# Altium PCB NanoVTX_es1.PcbDoc (part 4 of 4)
Units mm, origin at the board's own origin, x right, y up, seen from the top; angles counter-clockwise.
Board outline 40.21 x 28.18 mm, 6 copper layers (Top Layer, GND1, SIGNAL, POWER, GND2, Bottom Layer), stack 0.816 mm thick; 295 components, 218 nets, 1362 pads, 709 vias.
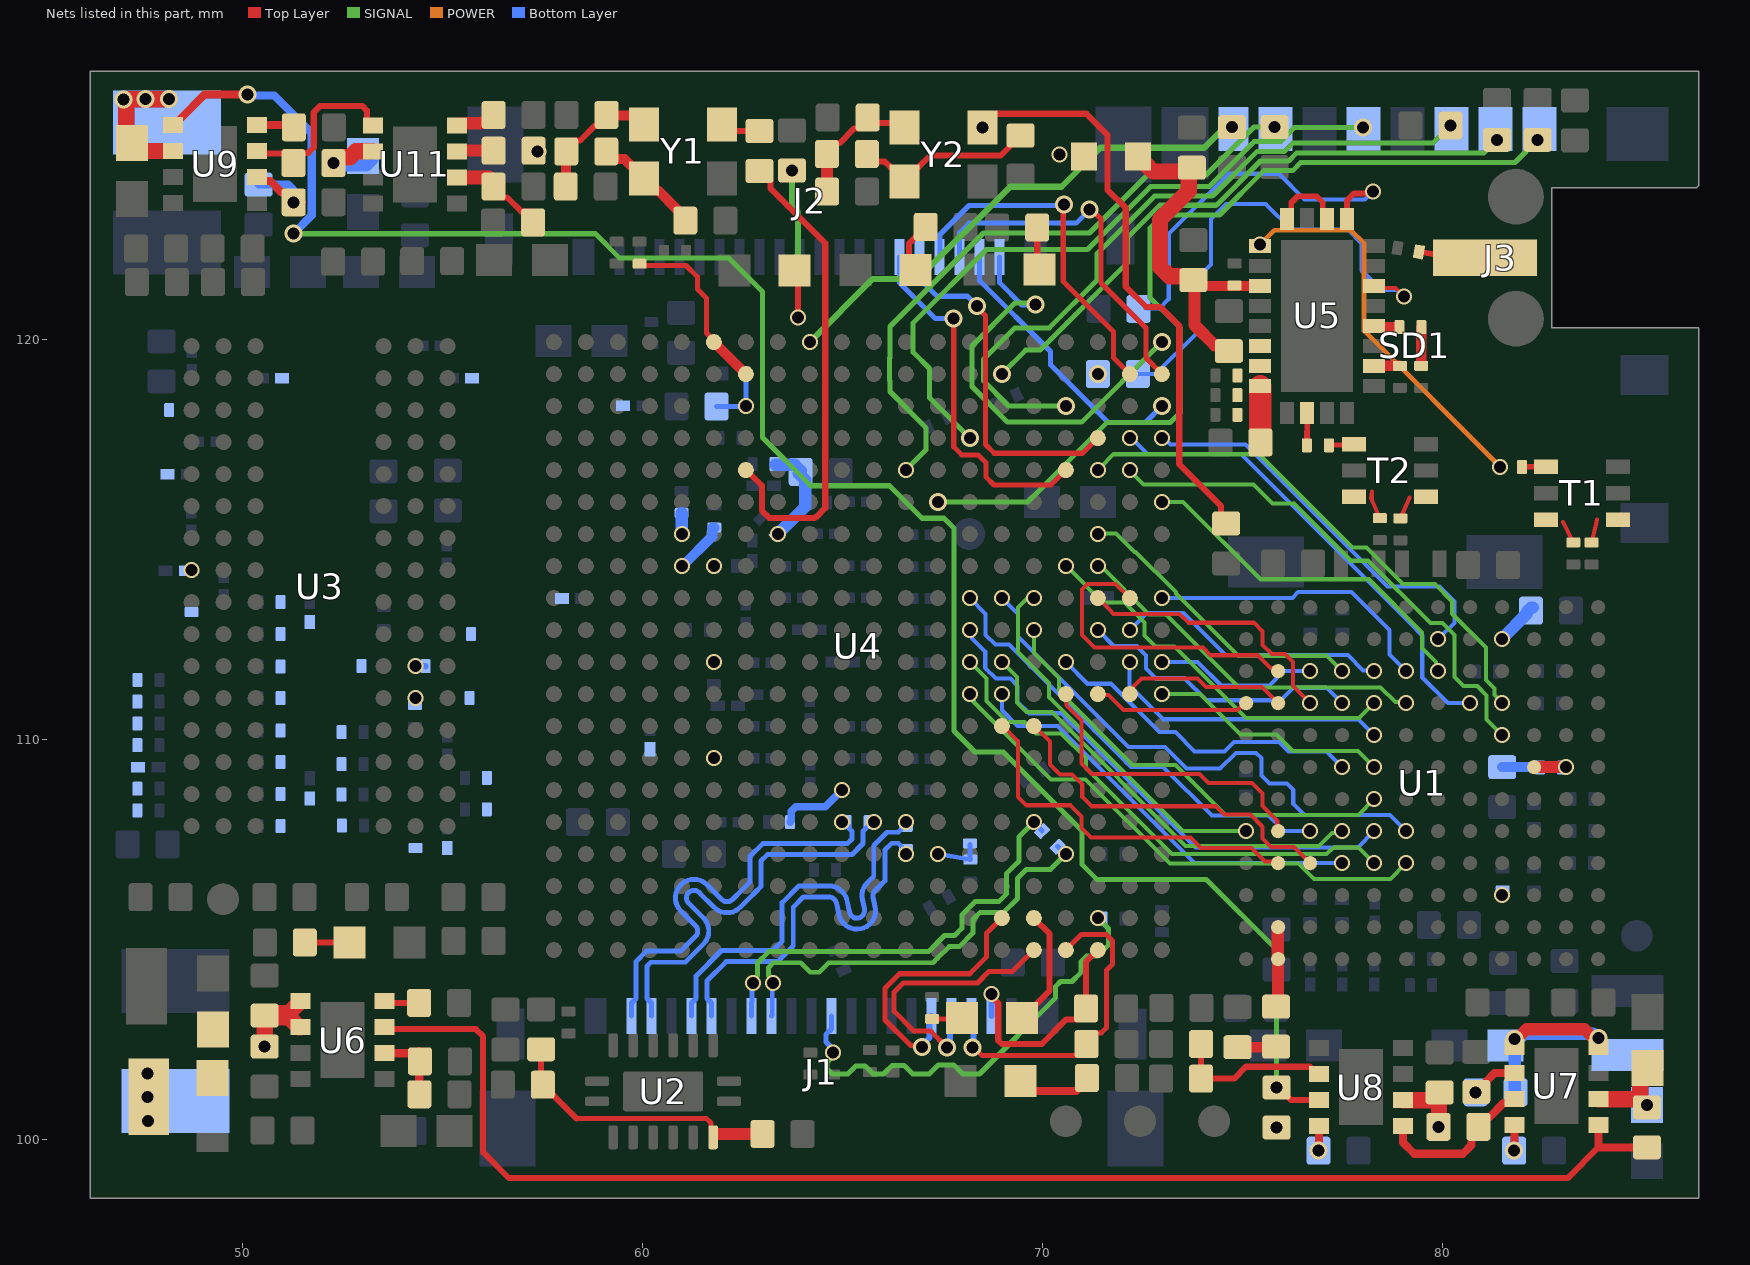
[diagram p7: the nets of this part, all layers, seen from the top]

## Via types
v1: diameter 0.4, hole 0.3, Top Layer to Bottom Layer, tented both sides, 609 vias
v2: diameter 0.45, hole 0.3, Top Layer to Bottom Layer, tented both sides, 85 vias
v3: diameter 0.5, hole 0.3, Top Layer to Bottom Layer, tented both sides, 13 vias
v4: diameter 0.5, hole 0.3, Top Layer to Bottom Layer, 2 vias

## Nets (pads, with @x,y where several pads share a name; then routed paths per layer and width w, separated by ;. In a path a pad name is that pad's centre, name@x,y a point inside that pad or via, vN(x,y) a via of type N, cw(c..) or ccw(c..) an arc to the next point about the centre after c; other vN are vias at no path point) (continued)
MIPI_D0_P: J1.10 R80.2 R81.1 U4.W18 | length 11.6
  SIGNAL w0.123: v1(64.77,102.159) 64.77,102.071 64.622,101.923 64.622,101.749 64.746,101.625 65.139,101.625 65.342,101.829 65.568,101.829 65.771,101.625 66.029,101.625 66.245,101.841 66.54,101.841 66.756,101.625 67.174,101.625 67.403,101.854 67.781,101.854 68.01,101.625 68.428,101.625 70.332,103.53 70.332,103.815 70.456,103.938 70.741,103.938 70.96,104.158 70.96,104.434 71.098,104.572 71.374,104.572 71.649,104.847 71.649,105.262 v1(71.387,105.524)
  Bottom Layer w0.123: J1.10@64.728,103.077 64.728,102.752 64.592,102.616 64.592,102.425 64.77,102.247 v1(64.77,102.159)
MIPI_D1_N: J1.13 R78.2 U4.U17 | length 10.9
  SIGNAL w0.123: v1(63.267,103.901) 63.267,103.975 63.154,104.088 63.154,104.285 63.276,104.407 63.96,104.407 64.197,104.169 64.419,104.169 64.657,104.407 67.265,104.407 67.374,104.515 67.67,104.811 67.924,104.811 68.265,105.152 68.265,105.487 68.445,105.667 69.037,105.667 69.378,106.008 69.378,106.519 69.478,106.62 69.596,106.737 70.2,106.737 v1(70.587,107.124)
  Bottom Layer w0.123: J1.13@63.228,103.077 63.248,103.096 63.248,103.881 v1(63.267,103.901) ; R78.2@70.381,107.309 70.392,107.309 70.576,107.124 v1(70.587,107.124)
MIPI_D1_P: J1.14 R78.1 U4.T16 | length 10.9
  SIGNAL w0.123: v1(62.766,103.895) 62.766,103.97 62.879,104.083 62.879,104.399 63.162,104.682 67.151,104.682 67.179,104.71 67.555,105.086 67.81,105.086 67.99,105.266 67.99,105.601 68.331,105.942 68.923,105.942 69.102,106.122 69.102,106.633 69.283,106.815 69.415,106.946 69.415,107.552 v1(69.787,107.924)
  Bottom Layer w0.123: J1.14@62.728,103.077 62.728,103.402 62.747,103.421 62.747,103.876 v1(62.766,103.895) ; v1(69.787,107.924) 69.787,107.913 69.992,107.708 R78.1@69.992,107.698
MIPI_D2_N: J1.16 R75.2 U4.U12 | length 9.6
  Bottom Layer w0.123: J1.16@61.728,103.077 61.728,103.402 61.616,103.514 61.616,103.957 62.095,104.436 63.382,104.436 63.772,104.826 63.772,105.795 64.027,106.05 64.076,106.05 64.666,106.05 cw(c64.666,105.862) 64.85,105.901 64.913,105.613 ccw(c65.366,105.71) 65.463,105.255 ccw(c65.367,105.71) 65.82,105.808 ; 65.77,106.039 65.82,105.808 ; 65.77,106.039 cw(c65.954,106.08) 65.821,106.213 65.97,106.362 66.062,106.454 66.062,106.528 66.062,107.224 66.231,107.393 66.401,107.393 66.473,107.321 66.473,107.319 66.536,107.256 R75.2@66.586,107.256
  other v1: 66.587,107.124
MIPI_D2_P: J1.17 R75.1 U4.T12 | length 10.2
  Bottom Layer w0.123: J1.17@61.228,103.077 61.228,103.402 61.34,103.514 61.34,104.071 61.98,104.711 63.268,104.711 63.497,104.94 63.497,105.91 63.913,106.326 64.016,106.326 64.666,106.326 cw(c64.666,105.862) 65.108,106.002 65.111,105.999 65.182,105.669 ccw(c65.366,105.71) 65.407,105.525 ccw(c65.367,105.71) 65.551,105.749 ; 65.551,105.75 65.501,105.982 cw(c65.954,106.08) 65.626,106.408 65.775,106.557 65.786,106.568 65.786,107.201 65.786,107.338 66.117,107.669 66.401,107.669 66.473,107.741 66.473,107.81 v1(66.587,107.924)
MIPI_D3_N: J1.20 R84.2 U4.T10 | length 10.8
  Bottom Layer w0.123: J1.20@59.728,103.077 59.728,103.402 59.84,103.514 59.84,104.436 60.099,104.695 60.96,104.695 61.189,104.924 61.329,105.064 ccw(c61.197,105.198) 61.33,105.332 60.962,105.699 cw(c61.291,106.028) 60.962,106.356 cw(c61.291,106.028) 61.619,106.355 61.986,105.989 ccw(c62.12,106.122) 62.254,105.989 62.494,106.229 62.636,106.371 62.687,106.422 62.687,107.064 63.009,107.386 65.126,107.386 65.241,107.5 65.241,107.69 65.172,107.759 65.172,107.808 65.153,107.827 65.063,107.827 64.987,107.904 v1(64.987,107.924)
MIPI_D3_P: J1.19 R84.1 U4.T11 | length 10.8
  Bottom Layer w0.123: J1.19@60.228,103.077 60.228,103.402 60.116,103.514 60.116,104.322 60.213,104.419 61.074,104.419 61.384,104.729 61.524,104.869 ccw(c61.197,105.198) 61.525,105.527 61.158,105.894 cw(c61.291,106.028) 61.424,106.161 ; 61.425,106.16 61.791,105.794 ccw(c62.12,106.122) 62.448,105.794 62.689,106.035 62.83,106.176 62.963,106.308 62.963,106.949 63.124,107.11 65.241,107.11 65.517,107.386 65.517,107.697 65.744,107.924 v1(65.787,107.924)
MIPI_GPIO0: J1.4 U4.Y16 | length 6.9
  Top Layer w0.127: v2@67.619,102.287 67.209,102.697 66.793,102.697 66.295,103.194 66.295,103.674 66.523,103.902 68.378,103.902 68.667,104.191 69.253,104.191 U4.Y16@69.787,104.724
  Bottom Layer w0.152: v2(67.619,102.282) 67.619,102.363 67.691,102.434 67.691,103.039 J1.4@67.728,103.077
MIPI_GPIO1: J1.5 U4.W15 | length 6.9
  Top Layer w0.127: v2(66.988,102.295) 66.94,102.342 66.702,102.342 66.067,102.977 66.067,103.769 66.429,104.131 68.185,104.131 68.6,104.546 68.6,105.138 U4.W15@68.987,105.524
  Bottom Layer w0.152: v2(66.988,102.295) 66.988,102.341 67.179,102.533 67.179,103.028 J1.5@67.228,103.077
MIPI_SCL: J1.3 R92.2 U4.Y17 | length 8.2
  Top Layer w0.127: v2(68.259,102.282) 68.295,102.282 68.495,102.083 70.792,102.083 70.804,102.095 70.867,102.095 71.103,102.331 71.103,102.418 71.338,102.654 71.473,102.654 71.608,102.789 71.608,104.224 71.759,104.374 71.759,104.953 71.598,105.113 70.976,105.113 U4.Y17@70.587,104.724
  Bottom Layer w0.152: J1.3@68.228,103.077 68.277,103.028 68.277,102.466 68.278,102.465 68.278,102.302 v2(68.259,102.282)
MIPI_SDA: J1.2 R91.2 U4.Y18 | length 6
  Top Layer w0.152: v1(68.733,103.631) 68.733,103.558 68.899,103.393 68.899,102.464 68.988,102.375 69.987,102.375 70.602,102.99 70.866,102.99 71.09,103.214 R91.2@71.09,103.264 ; R91.2@71.09,103.264 71.09,104.427 U4.Y18@71.387,104.724
  Bottom Layer w0.152: J1.2@68.728,103.077 68.731,103.079 68.731,103.628 v1(68.733,103.631)
NetC1_1: C1.1 FB5.2 R2.2 Y2.4 | length 3.4
  Top Layer w0.152: R2.2@64.613,124.625 64.613,124.675 64.837,124.899 64.933,124.899 65.299,125.266 65.41,125.266 65.634,125.489 C1.1@65.634,125.539 65.77,125.403 66.44,125.403 Y2.4@66.554,125.289
  Top Layer w0.305: R2.2@64.613,124.625 64.615,124.623 64.615,123.688 FB5.2@64.618,123.685
NetC7_2: C7.2 R3.1 | length 0.9
  Bottom Layer w0.254: C7.2@81.496,109.296 R3.1@82.442,109.296
NetC8_2: C8.2 R5.1 | length 0.8
  Top Layer w0.254: C8.2@74.879,102.294 R5.1@75.69,102.294
NetC15_2: C15.2 L2.1 R13.1 U7.4 U7.5 | length 5.8
  Top Layer w0.305: v2(81.81,102.498) 81.85,102.498 81.922,102.57 81.933,102.57 82.106,102.743 83.557,102.743 83.742,102.558 83.878,102.558 v2(83.905,102.53)
  Bottom Layer w0.305: R13.1@81.831,101.169 81.81,101.19 v2(81.81,102.498) 81.85,102.498 81.922,102.57 81.985,102.57 82.044,102.629 83.767,102.629 83.866,102.53 v2(83.905,102.53)
NetC16_1: C16.1 C147.1 C149.1 FB1.2 U4.G8 | length 2.6
  Bottom Layer w0.305: FB1.2@63.332,116.855 63.812,116.855 63.959,116.708 C149.1@63.959,116.675 ; C16.1@63.357,115.135 63.376,115.135 v1(63.387,115.124) 64.072,115.809 64.072,116.477 C149.1@63.912,116.637
NetC31_2: C31.2 U7.8 | length 0.6
  Top Layer w0.203: v2(81.796,99.708) 81.801,99.712 U7.8@81.801,100.346
NetC33_1: C33.1 J3.1 | length 0.7
  Top Layer w0.14: C33.1@79.418,122.179 C33.1@79.473,122.17 ; J3.1@79.822,122.11 79.834,122.11 J3.1@80.134,122.056
  Top Layer w0.152: C33.1@79.473,122.17 J3.1@79.822,122.11
NetC54_2: C54.2 U6.8 | length 0.9
  Top Layer w0.152: U6.8@53.556,103.444 53.596,103.403 C54.2@54.419,103.403
NetC100_2: C100.2 U8.8 | length 0.7
  Top Layer w0.203: U8.8@76.788,100.32 76.814,100.32 76.912,100.222 76.912,99.713 v2(76.907,99.708)
NetC103_2: C103.2 U9.8 | length 1.1
  Top Layer w0.203: U9.8@50.373,125.353 51.439,125.353 C103.2@51.486,125.4
NetC107_1: C107.1 T1.1 | length 0.6
  Top Layer w0.14: C107.1@81.991,116.802 82.046,116.802 82.56,116.802 T1.1@82.59,116.802
NetC108_1: C108.1 T2.1 | length 0.6
  Top Layer w0.14: C108.1@77.165,117.343 77.22,117.346 77.229,117.346 77.751,117.371 77.759,117.371 T2.1@77.789,117.373
NetC117_1: C117.1 C126.1 C127.1 C128.1 C153.2 C154.2 C155.2 C156.2 FB4.2 U5.19 U5.22 U5.23 U5.24 | length 10.3
  Top Layer w0.254: FB4.2@72.394,124.537 FB4.2@72.394,124.562 ; C126.1@73.812,121.328 74.803,121.328 U5.19@75.444,121.328 ; U5.24@75.444,118.828 U5.24@75.452,118.82
  Top Layer w0.305: C126.1@73.803,121.319 73.803,120.35 74.308,119.845 74.516,119.845 C117.1@74.663,119.697
  Top Layer w0.406: FB4.2@72.394,124.537 72.516,124.415 72.541,124.415 72.77,124.185 C127.1@73.589,124.185 ; C127.1@73.736,124.282 73.659,124.205 73.659,123.704 72.939,122.984 72.939,121.806 73.177,121.568 73.678,121.568 C126.1@73.774,121.471
  Top Layer w0.559: C128.1@75.452,117.414 U5.24@75.452,118.82
NetC129_1: C129.1 R67.1 | length 1
  Top Layer w0.254: R67.1@79.47,119.33 79.472,119.33 79.474,119.332 C129.1@79.474,120.295
NetC129_2: C129.2 U5.8 | length 0.6
  Top Layer w0.254: U5.8@78.294,120.328 78.327,120.295 C129.2@78.924,120.295
NetC142_2: C142.2 U11.8 | length 1.1
  Top Layer w0.305: U11.8@55.364,125.341 55.411,125.388 55.634,125.388 55.64,125.395 55.956,125.395 55.965,125.404 56.134,125.404 56.282,125.552 C142.2@56.282,125.602
NetC143_1: C143.1 R66.1 U4.C7 | length 1.7
  Bottom Layer w0.127: C143.1@61.854,118.313 62.636,118.313 v1@62.606,118.343 ; v1(62.587,118.324) R66.1@62.587,119.169
NetC146_1: C146.1 Y2.3 | length 14.7
  Top Layer w0.152: v1(68.504,125.289) 68.504,125.333 68.803,125.632 71.1,125.632 71.628,125.104 71.628,123.736 72.085,123.28 72.085,121.31 72.591,120.803 72.949,120.803 73.423,120.329 73.423,116.871 74.465,115.829 74.465,115.521 C146.1@74.597,115.389
NetC148_2: C148.2 FB6.2 R32.2 Y1.4 | length 3.3
  Top Layer w0.152: R32.2@58.271,124.912 58.322,124.962 58.444,124.962 58.81,125.329 58.882,125.329 C148.2@58.984,125.431
  Top Layer w0.254: FB6.2@58.085,123.812 58.091,123.819 58.091,124.682 R32.2@58.098,124.689 58.098,124.739 R32.2@58.271,124.912 ; C148.2@58.952,125.463 59.092,125.603 C148.2@59.106,125.603 59.118,125.59 60.025,125.59 Y1.4@60.099,125.516
NetD1_1: D1.1 R94.2 | length 1.1
  Top Layer w0.152: R94.2@51.562,104.915 D1.1@52.68,104.915
NetD2_1: D2.1 R63.2 | length 1.1
  Top Layer w0.152: R63.2@69.872,122.787 69.872,121.794 D2.1@69.928,121.738
NetD3_1: D3.1 R64.2 | length 1.3
  Top Layer w0.152: D3.1@66.513,121.732 66.667,121.886 66.667,122.388 66.81,122.531 66.86,122.531 67.084,122.755 R64.2@67.084,122.805
NetD4_1: D4.1 R87.2 | length 0.8
  Top Layer w0.127: R87.2@67.246,103.001 67.973,103.001 D4.1@67.994,103.022
NetD5_1: D5.1 R71.2 | length 1.9
  Top Layer w0.203: D5.1@69.456,101.448 69.703,101.201 70.842,101.201 71.115,101.474 R71.2@71.115,101.524
NetD6_1: D6.1 R82.2 | length 5
  Top Layer w0.152: D6.1@63.737,121.719 63.891,121.565 v1(63.891,120.54)
  SIGNAL w0.152: v1(63.74,124.215) 63.74,123.334 63.891,123.183 v1(63.891,120.54)
NetR1_1: R1.1 Y1.3 | length 1
  Top Layer w0.152: Y1.3@61.986,125.364 62.148,125.201 R1.1@62.928,125.201
NetR2_1: R2.1 R8.2 Y2.1 | length 4.6
  Top Layer w0.152: R2.1@65.613,124.625 65.797,124.441 66.052,124.441 66.205,124.288 66.255,124.288 Y2.1@66.554,123.989 ; Y2.1@66.554,123.939 Y2.1@66.554,123.989 ; R8.2@69.456,125.087 68.956,124.587 67.202,124.587 66.903,124.288 66.853,124.288 Y2.1@66.554,123.989
NetR3_2: R3.2 U1.G2 U1.G3 | length 0.8
  Top Layer w0.305: U1.G3@82.295,109.296 v1(83.095,109.296)
NetR4_1: R4.1 U1.C4
  other v1: 81.495,106.096
NetR5_2: R5.2 U1.A11 U1.B11 | length 2
  Top Layer w0.305: R5.2@75.844,103.308 75.895,103.36 U1.A11@75.895,104.496 ; U1.A11@75.886,104.506 75.886,105.287 U1.B11@75.895,105.296
NetR6_2: R6.2 U1.L4 | length 1.1
  Bottom Layer w0.305: v1(81.495,112.496) 81.495,112.513 82.118,113.136 82.118,113.186 82.216,113.284 R6.2@82.266,113.284
NetR9_1: R9.1 R10.2 U6.6 | length 1.8
  Top Layer w0.203: U6.6@53.556,102.144 54.37,102.144 54.423,102.197 54.423,101.299 R9.1@54.407,101.282
NetR12_1: R12.1 R13.2 U7.6 | length 1.2
  Top Layer w0.203: v2(80.831,101.169) 80.891,101.169 81.097,101.375 81.097,101.434 81.308,101.646 U7.6@81.801,101.646
NetR15_1: R15.1 R16.2 U8.6 | length 4
  Top Layer w0.152: R16.2@73.969,102.375 R15.1@73.969,101.511 74.793,101.511 75.088,101.806 76.68,101.806 76.865,101.62 U8.6@76.915,101.62
NetR18_1: R18.1 R19.2 U9.6 | length 2.7
  Top Layer w0.203: U9.6@50.379,124.045 50.471,123.953 50.697,123.953 50.983,123.667 51.084,123.667 51.182,123.569 51.182,123.469 51.232,123.419 v2(51.283,123.419) R18.1@51.486,123.419
  Bottom Layer w0.203: R19.2@50.406,123.86 51.143,123.86 51.262,123.741 51.262,123.439 v2(51.283,123.419)
NetR24_2: R24.2 U4.G5 | length 0.5
  Bottom Layer w0.305: v1@60.987,115.15 R24.2@60.987,115.644
  other v1: 60.987,115.124
NetR27_2: R27.2 U4.H5 | length 1.3
  Bottom Layer w0.254: v1(60.987,114.324) 61.005,114.324 61.75,115.069 61.75,115.28 61.752,115.282 R27.2@61.798,115.282
NetR28_1: R28.1 R29.2 U11.6 | length 2.4
  Top Layer w0.152: R28.1@56.282,123.926 56.282,123.761 56.506,123.537 56.62,123.537 56.968,123.189 57.248,123.189 R29.2@57.274,123.164
  Top Layer w0.356: U11.6@55.364,124.041 56.167,124.041 R28.1@56.282,123.926
NetR32_1: R32.1 R34.2 Y1.1 | length 2.8
  Top Layer w0.254: R32.1@59.098,124.689 59.098,124.675 59.271,124.502 59.548,124.502 59.738,124.312 59.788,124.312 60.036,124.064 60.036,123.964 60.284,123.716 60.39,123.716 60.901,123.204 60.901,123.184 61.106,122.979 R34.2@61.126,122.979
NetR37_1: R37.1 U4.A6 U4.B7 | length 4.5
  Top Layer w0.127: R37.1@59.931,121.882 59.976,121.837 61.093,121.837 61.375,121.555 61.375,121.25 61.603,121.022 61.603,120.147 61.787,119.964 U4.A6@61.787,119.924
  Top Layer w0.254: U4.A6@61.787,119.924 U4.B7@62.587,119.124
NetR68_2: R68.2 U5.13 | length 9.6
  Top Layer w0.152: U5.13@77.619,123.003 77.619,123.466 77.791,123.638 78.223,123.638 v1(78.27,123.685)
  Bottom Layer w0.104: R68.2@72.606,120.764 72.927,120.764 73.158,120.995 73.158,122.625 74.664,124.13 75.913,124.13 76.554,123.489 78.061,123.489 78.257,123.685 v1(78.27,123.685)
NetR69_2: R69.2 U5.10 | length 12.1
  Top Layer w0.104: U5.10@78.294,121.328 78.343,121.279 78.832,121.279 v1(79.046,121.065)
  Bottom Layer w0.104: R69.2@72.387,119.124 72.833,119.124 73.85,120.142 73.85,121.497 74.22,121.866 74.22,123 74.593,123.374 75.584,123.374 76.225,122.733 77.639,122.733 77.985,122.387 77.985,121.706 78.458,121.233 78.837,121.233 79.005,121.065 v1(79.046,121.065)
NetR70_1: R70.1 U5.6 | length 0.6
  Top Layer w0.254: U5.6@78.294,119.328 78.296,119.33 R70.1@78.937,119.33
NetR77_2: R77.2 U3.L8 | length 0.3
  Bottom Layer w0.152: v1(54.33,111.824) 54.333,111.822 54.578,111.822 R77.2@54.581,111.819
NetR89_1: R89.1 U4.R10 | length 1.8
  Bottom Layer w0.191: R89.1@63.694,107.924 63.724,107.953 63.724,108.194 63.835,108.306 64.568,108.306 v1(64.987,108.724)
NetR90_1: R90.1 U4.L6
  other v1: 61.787,111.924
NetU5_14: U5.14 U5.16 | length 1.8
  Top Layer w0.141: U5.16@76.119,123.003 76.224,123.107 76.224,123.407 76.387,123.57 76.858,123.57 77.014,123.414 77.014,123.107 U5.14@77.119,123.003
PA_EN: R69.1 U4.B18 | length 0.1
  Bottom Layer w0.152: v2(71.387,119.124) R69.1@71.535,119.124
PL_A20: J2.20 U4.A20 | length 10.8
  SIGNAL w0.127: v2(69.825,120.867) 69.788,120.904 69.318,120.904 68.241,119.826 68.241,118.81 69.131,117.92 70.982,117.92 v2(72.987,119.924)
  Bottom Layer w0.127: J2.20@68.934,122.047 68.934,121.404 69.481,120.857 69.815,120.857 v2(69.825,120.867)
PL_B19: J2.17 U4.B19 | length 8.9
  Top Layer w0.127: v2(70.544,123.363) 70.523,123.342 70.523,121.44 71.78,120.183 71.78,119.531 U4.B19@72.187,119.124
  Bottom Layer w0.127: J2.17@67.434,122.047 67.444,122.058 67.444,122.613 68.167,123.336 70.517,123.336 v2(70.544,123.363)
PL_B20: J2.18 U4.B20 | length 9
  Top Layer w0.127: v2(71.177,123.243) 71.218,123.243 71.464,122.998 71.464,121.398 72.589,120.274 72.589,119.522 U4.B20@72.987,119.124
  Bottom Layer w0.127: J2.18@67.934,122.047 67.934,122.658 68.172,122.897 70.846,122.897 71.177,123.228 v2(71.177,123.243)
PL_C20: J2.19 U4.C20 | length 7
  Bottom Layer w0.127: J2.19@68.434,122.047 68.434,121.457 70.206,119.685 70.206,119.357 71.648,117.915 72.577,117.915 v2(72.987,118.324)
PL_D18: J2.16 U4.D18 | length 8.9
  Top Layer w0.127: v2(68.367,120.822) 68.367,120.789 68.577,120.578 68.577,117.363 68.796,117.144 71.007,117.144 U4.D18@71.385,117.523
  Bottom Layer w0.127: J2.16@66.934,122.047 66.955,122.026 66.955,121.481 67.367,121.069 68.131,121.069 68.367,120.834 v2(68.367,120.822)
PL_E17: J2.15 U4.E17 | length 9.1
  Top Layer w0.127: v2(67.785,120.508) 67.785,117.305 67.986,117.104 68.394,117.104 68.587,116.911 68.587,116.554 68.793,116.348 70.211,116.348 U4.E17@70.587,116.724
  Bottom Layer w0.127: J2.15@66.434,122.047 66.434,121.401 67.327,120.508 v2(67.785,120.508)
PL_W16: D4.2 U4.W16 | length 3
  Top Layer w0.152: D4.2@69.494,103.022 70.183,103.711 70.183,105.128 U4.W16@69.787,105.524
PS_REF_CLK: R1.2 U4.E7 | length 12.1
  Top Layer w0.152: U4.E7@62.587,116.724 62.603,116.724 62.989,116.338 62.989,115.708 63.168,115.529 64.308,115.529 64.325,115.546 64.343,115.546 64.573,115.776 64.573,122.395 63.202,123.766 63.202,123.978 62.979,124.201 R1.2@62.928,124.201
PUDC_B: R62.1 R95.2 U4.U13 | length 1.2
  Bottom Layer w0.123: v1@67.406,107.121 68.084,107.005 68.086,107.005 R62.1@68.199,106.985 68.193,106.991 68.193,107.351 R95.2@68.186,107.357
  other v1: 67.387,107.124
RX1A_N: C9.1 T1.4 | length 0.6
  Top Layer w0.102: C9.1@83.731,114.913 83.752,114.987 83.752,114.999 83.841,115.372 83.869,115.491
RX1A_P: C10.1 T1.3 | length 0.6
  Top Layer w0.102: 83.016,115.43 83.039,115.371 83.046,115.371 83.228,115.005 83.228,114.987 C10.1@83.274,114.913
RX_1: C107.2 U5.17 | length 9.9
  POWER w0.12: v1(75.444,122.367) 75.797,122.72 77.714,122.72 78.042,122.391 78.042,120.201 v1(81.441,116.802)
RX_D0: U1.K11 U4.J19 | length 7.8
  Top Layer w0.102: U4.J19@72.187,113.524 71.834,113.877 71.129,113.877 70.993,113.741 70.993,112.598 71.304,112.288 74.014,112.288 74.208,112.093 75.39,112.093 75.709,111.774 75.749,111.774 75.826,111.696 U1.K11@75.895,111.696
RX_D1: U1.J12 U4.M18 | length 3.9
  Top Layer w0.102: U4.M18@71.387,111.124 71.411,111.1 71.658,111.1 72.03,110.727 74.876,110.727 75.045,110.896 U1.J12@75.095,110.896
RX_D2: U1.K10 U4.L20 | length 4.1
  Bottom Layer w0.102: v1(72.987,111.924) 73.884,111.924 74.473,111.336 75.673,111.336 76.034,111.696 v1(76.695,111.696)
RX_D3: U1.J11 U4.M19 | length 4.2
  Top Layer w0.102: U4.M19@72.187,111.124 72.187,111.227 72.478,111.517 73.877,111.517 74.092,111.303 75.489,111.303 U1.J11@75.895,110.896
RX_D4: U1.K9 U4.G18 | length 7.5
  SIGNAL w0.102: v1@71.399,115.138 71.843,115.138 72.304,114.677 72.333,114.677 73.339,113.67 73.339,113.642 74.9,112.081 77.111,112.081 v1(77.495,111.696)
  other v1: 71.387,115.124
RX_D5: U1.J10 U4.J18 | length 7
  Top Layer w0.102: U4.J18@71.352,113.559 71.678,113.233 71.783,113.128 73.433,113.128 73.655,112.907 75.288,112.907 75.501,112.693 75.501,112.354 75.736,112.12 76.069,112.12 76.265,111.923 76.265,111.326 v1(76.695,110.896)
RX_D6: U1.K8 U4.K19 | length 6.9
  Bottom Layer w0.102: v1(72.187,112.724) 72.612,113.149 73.529,113.149 74.581,112.097 77.637,112.097 78.019,111.715 78.276,111.715 v1(78.295,111.696)
RX_D7: U1.J9 U4.K18 | length 7.3
  Bottom Layer w0.102: v1(71.387,112.724) 71.792,112.319 72.361,112.319 72.595,112.085 72.595,111.766 72.843,111.518 73.559,111.518 74.108,110.97 75.966,110.97 76.278,111.282 77.11,111.282 v1(77.495,110.896)
RX_D8: U1.K7 U4.J20 | length 7.3
  Bottom Layer w0.102: v1@73.039,113.524 76.25,113.524 76.395,113.67 77.732,113.67 78.682,112.72 78.682,112.109 v1(79.095,111.696)
  other v1: 72.987,113.524
RX_D9: U1.J8 U4.H17 | length 9.6
  SIGNAL w0.102: v1@70.612,114.313 71.508,113.417 72.054,113.417 72.556,112.914 72.556,112.585 72.831,112.31 73.301,112.31 75.088,110.523 77.922,110.523 v1(78.295,110.896)
  other v1: 70.587,114.324
RX_D10: U1.J7 U4.H18 | length 9.1
  SIGNAL w0.102: v1@71.45,114.338 72.67,113.118 73.094,113.118 74.922,111.291 78.458,111.291 78.826,110.923 79.069,110.923 v1(79.095,110.896)
  other v1: 71.387,114.324
RX_D11: U1.H8 U4.L19 | length 7.2
  Bottom Layer w0.102: v1(72.187,111.924) 72.176,111.913 72.176,111.336 73.017,110.494 77.897,110.494 v1(78.295,110.096)
RX_FRAME_P: U1.G8 U4.M20 | length 6.1
  SIGNAL w0.102: v1(72.987,111.124) 73.94,111.124 74.957,110.108 75.85,110.108 76.26,109.697 77.895,109.697 v1(78.295,109.296)
SD_CLK: SD1.5 U4.D14 | length 16.7
  SIGNAL w0.127: v2(68.187,117.524) 67.18,118.531 67.18,119.261 66.771,119.67 66.771,120.403 68.603,122.235 71.131,122.235 72.709,123.813 74.172,123.813 75.292,124.933 75.958,124.933 76.171,125.147 76.171,125.157 76.3,125.285 v2(78.016,125.285)
SD_CMD: R59.1 SD1.3 U4.C17 | length 17.3
  SIGNAL w0.127: v2(70.587,118.324) 69.156,118.324 68.526,118.954 68.526,119.491 69.314,120.279 70.176,120.279 71.37,121.474 71.37,122.135 72.807,123.572 74.24,123.572 74.252,123.585 74.267,123.585 75.374,124.692 76.057,124.692 76.261,124.895 79.76,124.895 v1(80.2,125.336)
SD_D0: R60.1 SD1.7 U4.E12 | length 15.9
  SIGNAL w0.127: 66.189,120.092 66.189,120.31 68.527,122.649 71.176,122.649 72.627,124.099 74.09,124.099 75.289,125.298 v1(75.806,125.298) ; 66.19,120.091 66.19,119.527 66.184,119.521 66.184,118.957 66.189,118.953 66.189,118.685 67.094,117.78 67.094,117.231 v1(66.587,116.724)
SD_D1: R61.1 SD1.8 U4.A9 | length 12.8
  SIGNAL w0.152: v1(64.187,119.924) 65.764,121.501 66.888,121.501 69.194,123.807 70.479,123.807 71.453,124.781 74.044,124.781 74.51,125.247 74.694,125.247 v1(74.741,125.294)
SD_D2: R33.2 SD1.1 U4.F13 | length 22.5
  SIGNAL w0.127: v2(67.387,115.924) 69.633,115.924 71.626,117.917 73.203,117.917 73.434,118.148 73.434,120.287 72.695,121.027 72.695,122.777 73.02,123.102 74.431,123.102 75.538,124.209 76.257,124.209 76.461,124.413 81.817,124.413 v1(82.385,124.981)
SD_D3: R58.1 SD1.2 U4.B15 | length 15.2
  SIGNAL w0.127: v2(68.987,119.124) 69.584,119.721 69.941,119.721 72.123,121.903 72.123,122.529 72.938,123.344 74.334,123.344 74.337,123.346 74.352,123.346 75.456,124.451 76.157,124.451 76.361,124.654 81.042,124.654 v1(81.369,124.981)
SPI_CLK: U1.J5 U4.D19 | length 11.9
  Bottom Layer w0.102: v1@72.212,117.538 72.625,117.125 74.963,117.125 79.24,112.849 79.447,112.642 ; 79.447,112.641 79.498,112.591 79.498,111.538 80.14,110.896 v1(80.695,110.896)
  other v1: 72.187,117.524
SPI_DI: U1.J4 U4.E18 | length 13.6
  SIGNAL w0.102: v1@71.438,116.726 71.438,116.775 71.782,117.119 75.422,117.119 77.758,114.783 78.106,114.783 79.011,113.878 79.811,113.878 80.247,113.442 80.247,113.125 81.091,112.282 81.091,111.477 81.308,111.259 81.308,111.105 81.495,110.918 v1(81.495,110.896)
  other v1: 71.387,116.724
SPI_DO: U1.L6 U4.D20 | length 10.1
  Bottom Layer w0.102: v1(72.987,117.524) 73.042,117.524 73.205,117.362 75.082,117.362 78.631,113.812 79.924,113.812 80.302,113.434 80.302,112.903 v1(79.895,112.496)
SPI_ENB: U1.K6 U4.F20 | length 9
  SIGNAL w0.102: v1(72.987,115.924) 73.522,115.924 75.452,113.994 78.164,113.994 79.497,112.661 79.497,112.27 79.838,111.929 79.838,111.754 v1(79.895,111.696)
TX1A_N: C23.1 T2.3 | length 0.9
  Top Layer w0.102: 78.215,116.018 78.238,116.182 78.238,115.954 78.247,115.946 78.395,115.613 78.395,115.595 C23.1@78.436,115.52
TX1A_P: C24.1 T2.4 | length 0.6
  Top Layer w0.102: C24.1@78.954,115.519 78.994,115.593 78.994,115.611 79.139,115.943 79.14,115.943 79.179,116.036
TX_1: C108.2 U5.2 | length 0.8
  Top Layer w0.14: C108.2@76.615,117.343 76.615,117.449 76.615,117.457 76.618,117.941 76.618,117.948 U5.2@76.619,118.153
TX_D0: U1.E12 U4.J16 | length 9.3
  SIGNAL w0.102: v1@69.748,113.513 69.621,113.513 69.392,113.283 69.392,112.18 70.168,111.404 70.168,111.044 73.516,107.697 v1(75.095,107.697)
  other v1: 69.787,113.524
TX_D1: U1.D11 U4.N15 | length 9.3
  Top Layer w0.102: U4.N15@69,110.337 69.394,109.943 69.394,108.556 69.607,108.343 70.704,108.343 70.983,108.064 70.983,107.771 71.22,107.534 73.704,107.534 73.961,107.277 75.223,107.277 75.563,106.938 75.854,106.938 U1.D11@75.895,106.896
TX_D2: U1.E11 U4.M17 | length 7.8
  Top Layer w0.102: U4.M17@70.587,111.124 70.601,111.11 70.601,110.843 70.979,110.466 70.979,110.197 70.979,109.388 71.242,109.125 73.933,109.125 74.157,108.9 75.237,108.9 75.5,108.637 75.5,108.323 75.873,107.95 75.873,107.719 U1.E11@75.895,107.697
TX_D3: U1.D10 U4.N16 | length 9
  Top Layer w0.102: U4.N16@69.793,110.331 70.189,109.935 70.189,109.364 70.443,109.109 70.747,109.109 70.998,108.858 70.998,108.554 71.233,108.319 74.331,108.319 74.542,108.108 75.2,108.108 75.502,107.806 75.502,107.513 75.715,107.3 76.291,107.3 U1.D10@76.695,106.896
TX_D4: U1.E10 U4.J14 | length 11.2
  Bottom Layer w0.102: v1(68.187,113.524) 68.583,113.128 68.583,112.605 68.827,112.36 69.164,112.36 72.219,109.306 73.016,109.306 74.237,108.085 75.653,108.085 76.042,107.697 v1(76.695,107.697)
TX_D5: U1.D9 U4.M15 | length 10.5
  Bottom Layer w0.102: v1(68.987,111.124) 68.987,110.719 69.378,110.327 70.378,110.327 73.809,106.896 v1(77.495,106.896)
TX_D6: U1.E9 U4.L15 | length 10.9
  SIGNAL w0.102: v1(68.987,111.924) 69.363,111.548 69.363,110.914 69.603,110.674 70.237,110.674 73.583,107.328 76.916,107.328 77.24,107.652 77.45,107.652 v1(77.495,107.697)
TX_D7: U1.D8 U4.L14 | length 12.8
  SIGNAL w0.102: v1(68.187,111.924) 68.603,111.508 68.603,110.952 69.128,110.426 69.555,110.426 69.843,110.139 70.47,110.139 71.09,109.519 71.09,109.27 73.236,107.124 77.109,107.124 77.274,107.289 77.902,107.289 v1(78.295,106.896)
TX_D8: U1.E8 U4.K14 | length 13.1
  Bottom Layer w0.102: v1(68.187,112.724) 68.244,112.667 68.244,112.515 68.572,112.187 68.572,111.781 68.846,111.507 69.203,111.507 69.38,111.33 69.38,110.927 69.663,110.644 70.47,110.644 73.824,107.29 77.889,107.29 v1(78.295,107.697)
TX_D9: U1.D7 U4.M14 | length 13
  SIGNAL w0.102: v1(68.187,111.124) 68.187,111.043 68.285,110.945 68.285,110.927 70.221,108.991 71.082,108.991 73.189,106.884 76.407,106.884 76.789,106.502 78.701,106.502 v1(79.095,106.896)
TX_D10: U1.F8 U4.K16 | length 11.1
  SIGNAL w0.102: v1(69.787,112.724) 69.787,112.153 70.411,111.529 70.411,111.195 72.259,109.347 73.33,109.347 74.574,108.102 77.901,108.102 v1(78.295,108.496)
TX_D11: U1.E7 U4.J15 | length 13.6
  Bottom Layer w0.102: v1(68.987,113.524) 69.389,113.122 69.389,112.566 72.151,109.804 73.063,109.804 73.609,109.258 74.447,109.258 74.844,109.654 75.346,109.654 75.478,109.522 75.478,109.089 75.681,108.887 76.113,108.887 76.273,108.727 76.273,108.381 76.558,108.096 78.695,108.096 v1(79.095,107.697)
TX_FRAME_P: U1.G9 U4.L17 | length 8.2
  Bottom Layer w0.102: v1(70.587,111.924) 71.13,111.381 71.716,111.381 72.925,110.172 73.327,110.172 73.807,109.692 74.552,109.692 74.786,109.927 75.922,109.927 76.158,109.691 77.101,109.691 v1(77.495,109.296)
TXNRX_ENSM: U1.H4 U4.E19 | length 13
  SIGNAL w0.102: v1@72.202,116.685 72.524,116.363 75.28,116.363 75.757,115.886 76.289,115.886 77.718,114.456 78.146,114.456 79.704,112.898 80.007,112.898 80.303,112.602 80.303,111.551 80.529,111.324 80.873,111.324 81.105,111.092 81.105,110.486 v1(81.495,110.096)
  other v1: 72.187,116.724
VCC13_PG: R14.2 U7.7 U8.1 | length 4.1
  Top Layer w0.203: U8.1@79.015,100.32 79.015,99.915 79.298,99.632 80.516,99.632 80.731,99.846 80.731,100.132 R14.2@80.904,100.305 80.904,100.355 81.102,100.553 81.185,100.553 81.529,100.897 81.702,100.897 U7.7@81.801,100.996
VCC15_PG: R20.2 U9.7 U11.1 | length 4.5
  Top Layer w0.152: U9.7@50.245,124.633 51.091,124.633 51.253,124.472 51.432,124.651 51.648,124.651 51.784,124.788 51.784,125.665 51.947,125.827 52.997,125.827 53.115,125.709 53.115,125.439 53.214,125.341 U11.1@53.264,125.341
VCC18_PG: R17.2 U8.7 U9.1 | length 48.9
  Top Layer w0.152: v2(75.857,101.287) 75.907,101.287 76.131,101.063 76.131,101.059 76.22,100.97 U8.7@76.915,100.97
  Top Layer w0.203: U9.1@48.442,125.493 49.059,126.109 v2(50.134,126.109)
  SIGNAL w0.127: v2(51.279,122.631) 58.826,122.631 59.436,122.022 62.166,122.022 63.005,121.183 63.005,117.538 64.211,116.332 66.18,116.332 66.992,115.519 67.543,115.519 67.792,115.27 67.792,110.198 68.315,109.676 69.024,109.676 70.988,107.712 70.988,106.866 71.37,106.483 74.106,106.483 75.857,104.732 v2(75.857,101.287)
  Bottom Layer w0.203: v2(50.134,126.109) 50.152,126.092 50.797,126.092 51.734,125.155 51.734,123.086 v2(51.279,122.631)
VCC33_PG: R30.2 U11.7 | length 0.9
  Top Layer w0.305: U11.7@55.423,124.715 56.233,124.715 R30.2@56.282,124.764
VCC_1.2: C140.1 R25.2 R26.1 U2.15 | length 7.1
  Top Layer w0.127: 58.353,100.516 61.601,100.516 61.719,100.398 61.719,100.177 U2.15@61.769,100.127 ; U2.15@61.769,100.042 61.769,100.07 U2.15@61.826,100.127
  Top Layer w0.152: R25.2@57.468,102.243 57.468,101.401 R26.1@57.51,101.359 57.51,101.309 57.734,101.085 57.784,101.085 58.353,100.516
  Top Layer w0.305: U2.15@61.826,100.127 C140.1@63.005,100.127
VCCINT_PG: R11.2 U6.7 U7.1 | length 35.7
  Top Layer w0.152: U6.7@53.556,102.794 53.604,102.746 55.839,102.746 56.02,102.565 56.02,101.726 56.02,99.669 56.666,99.023 83.132,99.023 83.901,99.792
  Top Layer w0.203: U7.1@83.901,100.346 83.901,99.792 R11.2@85.115,99.792
VIN: C21.1 C22.1 C28.2 C30.2 C88.2 C102.2 C139.1 C141.2 C144.2 C145.2 C150.2 FB4.1 pwr+1.1 R11.1 R14.1 R17.1 R20.1 R30.1 U6.1 U6.2 U7.2 U8.2 U9.2 U11.2 | length 12.4
  Top Layer w0.406: C88.2@47.244,125.033 C88.2@47.244,124.906 47.244,124.898 47.441,124.701 U9.2@48.273,124.701 ; C88.2@47.244,125.086 47.244,125.136 47.095,125.285 47.095,125.905 47.028,125.972 v2(47.028,125.984) 47.036,125.992 47.067,125.992 47.072,125.997 v2(47.574,125.997) v2(48.171,125.997) ; v2(50.559,102.311) C22.1@50.559,103.086 ; U6.2@51.456,102.794 51.412,102.794 51.406,102.8 51.406,102.802 51.168,103.04 50.605,103.04 C22.1@50.559,103.086 ; U6.1@51.456,103.444 51.412,103.444 51.409,103.441 51.409,103.397 51.156,103.144 50.617,103.144 C22.1@50.559,103.086 ; v2(52.278,124.396) 52.278,124.447 52.375,124.543 52.694,124.543 52.842,124.691 U11.2@53.264,124.691 ; U8.2@79.015,100.97 79.69,100.97 79.884,101.164 C21.1@79.934,101.164 79.919,101.148 79.919,100.32 v2(79.904,100.305) ; U7.2@83.901,100.996 84.862,100.996 84.969,100.889 85.019,100.889 R11.1@85.115,100.792 ; R11.1@84.95,100.957 84.95,101.6 C102.2@85.128,101.778
  Bottom Layer w0.406: v2(52.278,124.396) 53.084,124.396 C141.2@53.213,124.525
  other v1: 47.638,100.444 47.625,101.054 47.625,101.638 70.434,124.612
  other v2: 75.857,100.287 85.115,100.851 57.383,124.691
VTTREF: C18.1 C19.2 C130.1 C131.1 C132.1 C133.1 C134.1 C135.1 C136.1 C137.1 C138.1 C151.1 C152.1 R21.2 R22.1 R23.2 R31.2 R35.2 R36.2 R38.2 R39.2 R40.2 R41.2 R42.2 R43.2 R44.2 R45.2 R46.2 R47.2 R48.2 R49.2 R50.2 R52.2 R53.2 R54.2 R55.2 R56.2 R57.2 R79.2 U3.H1 U3.M8 U4.H6 U4.P6
  other v1: 61.787,109.524 54.33,111.024 48.73,114.224 61.787,114.324
pads on no net: T1.6 T2.6 U1.A3 U1.B3 U1.B4 U1.B5 U1.B6 U1.B7 U1.C3 U1.C5 U1.C6 U1.D4 U1.D5 U1.E4 U1.E5 U1.E6 U1.F4 U1.F5 U1.F6 U1.G4 U1.G7 U1.H11 U1.L5 U1.M3 U1.M11 U3.J1 U3.J9 U3.L1 U3.L9 U3.M7 U4.A14 U4.A15 U4.A16 U4.A17 U4.B5 U4.B9 U4.B13 U4.B14 U4.B17 U4.C5 U4.C6 U4.C10 U4.C13 U4.C15 U4.C16 U4.C18 U4.D9 U4.D10 U4.D11 U4.D13 U4.D15 U4.E8 U4.E9 U4.E11 U4.E13 U4.E14 U4.E16 U4.F10 U4.F12 U4.F14 U4.F15 U4.F16 U4.F17 U4.G14 U4.G15 U4.G17 U4.H15 U4.H20 U4.K9 U4.L10 U4.N18 U4.N20 U4.P1 U4.P3 U4.P14 U4.P15 U4.P16 U4.P18 U4.P19 U4.P20 U4.R1 U4.R2 U4.R3 U4.R14 U4.R16 U4.R17 U4.R18 U4.R19 U4.T1 U4.T2 U4.T4 U4.T5 U4.T9 U4.T17 U4.T19 U4.T20 U4.U2 U4.U3 U4.U4 U4.U5 U4.U7 U4.U8 U4.U9 U4.U10 U4.U14 U4.U20 U4.V1 U4.V2 U4.V3 U4.V5 U4.V6 U4.V7 U4.V8 U4.V10 U4.V11 U4.V12 U4.V13 U4.V15 U4.V16 U4.V17 U4.V18 U4.V20 U4.W1 U4.W3 U4.W4 U4.W5 U4.W6 U4.W8 U4.W9 U4.W10 U4.W11 U4.W20 U4.Y1 U4.Y2 U4.Y3 U4.Y4 U4.Y6 U4.Y7 U4.Y8 U4.Y9 U4.Y11 U4.Y12 U4.Y13 U4.Y19

## Polygon pours and split planes (outlines as drawn)
GND on Top Layer "L1_CPWG" (solid, pour order 1): 86.004,124.975 86.004,110.223 85.509,109.728 77.191,109.728 77.191,111.201 74.955,113.436 74.955,115.76 73.533,117.183 73.533,120.587 73.774,120.587 73.774,123.215 75.547,124.988
+1.0 on Top Layer "NONET_L02_P-001" (solid, pour order 4): 67.849,115.323 62.179,115.323 62.179,108.306 67.776,108.306
+3.3 on POWER "NONET_L02_P-001" (solid, pour order 2): 68.187,108.966 70.587,108.966 71.945,110.325 72.533,110.325 73.097,109.852 73.097,104.408 73.096,104.407 67.907,104.407 67.907,106.658 68.187,106.938
+1.0 on POWER "NONET_L02_P-001" (solid, pour order 18): 51.93,105.715 51.206,104.691 51.206,99.898 51.752,99.352 59.021,99.352 63.78,104.111 63.78,106.744 67.387,107.124 67.387,108.724 62.331,108.724 62.331,107.912 60.134,105.715
+1.8 on POWER "NONET_L02_P-001" (solid, pour order 13): 65.787,114.324 68.187,114.324 68.224,107.899 67.412,107.899 67.387,107.124 63.78,106.743 62.217,104.669 62.217,98.895 80.15,98.895 80.15,103.016 76.601,103.016 74.532,105.084 74.41,117.116 72.187,118.324 70.587,118.324 70.587,117.524 69.297,116.725 66.524,116.721 64.987,116.724 64.008,116.717 63.387,115.924 63.387,111.124 64.187,110.324 64.187,108.724 64.987,108.724 65.787,109.524
+3.3 on POWER "NONET_L02_P-001" (solid, pour order 21): 66.966,117.145 62.966,117.145 61.785,118.326 61.785,122.958 68.888,122.958 69.24,122.606 69.24,119.739 69.926,119.053 69.926,117.475 69.175,116.724 67.387,116.724
+1.5 on POWER "NONET_L02_P-001" (solid, pour order 8): 61.787,122.316 58.371,125.732 46.725,125.732 46.725,107.618 48.298,106.045 60.445,106.045 61.787,107.924
+3.3 on POWER "NONET_L02_P-001" (solid, pour order 6): 55.232,122.25 55.232,125.768 55.74,126.276 69.939,126.276 70.307,125.908 68.821,124.422 68.821,122.531 65.414,119.124 61.787,119.124 61.787,119.524 59.89,121.421 56.062,121.421
1P3V_A on POWER "NONET_L02_P-001" (solid, pour order 15): 85.541,114.63 74.409,114.63 74.409,105.182 75.54,104.051 85.434,104.051
GND on POWER "L4_CPWG" (solid, pour order 19): 84.438,115.019 85.542,116.124 85.542,124.999 84.519,126.022 70.739,126.022 69.355,124.638 69.355,119.964 70.195,119.124 72.481,119.124 76.558,115.047 77.008,115.047
+3.3 on POWER "NONET_L02_P-001" (solid, pour order 3): 61.787,119.124 64.987,119.124 66.587,117.524 65.78,116.717 63.38,116.717 62.587,115.924 62.587,107.697 61.646,106.756 61.176,106.756 60.987,106.945 60.987,118.324
+1.0 on POWER "NONET_L02_P-001" (solid, pour order 16): 68.187,114.324 65.787,114.324 65.787,115.124 62.23,115.924 62.23,108.281 62.612,107.899 68.224,107.925
VIN on SIGNAL "NONET_L02_P-001" (solid, pour order 12): 49.535,125.945 46.834,125.946 46.749,125.809 46.749,99.403 47.104,99.047 85.471,99.047 85.471,100.99 76.619,100.99 76.581,101.028 76.568,101.016 51.244,101.016 49.047,103.213 49.047,120.231 52.603,123.787 70.853,123.787 70.853,125.945
+3.3 on SIGNAL "NONET_L02_P-001" (solid, pour order 20): 62.255,105.165 63.792,106.743 64.994,107.904 68.987,107.924 68.987,108.724 62.656,108.724 62.255,108.724 60.187,106.656 60.187,102.678 61.595,101.27 63.738,100.813 63.738,102.461 62.214,103.584
GND on SIGNAL "L3_CPWG" (solid, pour order 14): 84.884,125.127 83.904,124.146 81.564,124.146 81.407,123.99 75.654,123.99 73.812,122.149 73.812,117.526 74.828,117.526 75.158,117.196 76.657,117.196 80.241,113.612 84.884,113.612
+1.0 on SIGNAL "NONET_L02_P-001" (solid, pour order 17): 67.387,115.124 62.587,115.124 62.587,108.724 67.387,108.724
1P3V_B on SIGNAL "NONET_L02_P-001" (solid, pour order 5): 81.825,112.151 84.652,112.151 84.652,106.919 81.454,103.721 76.105,103.721 76.105,105.179 76.791,105.865 79.496,105.865 79.496,107.046 81.853,109.403
VTTREF on Bottom Layer "NONET_L02_P-001" (solid, pour order 10): 57.094,105.015 61.787,109.524 61.787,115.843 60.187,117.524 59.703,118.105 59.703,118.975 57.859,119.971 47.219,119.971 46.698,119.45 46.698,106.858 48.584,104.971
+1.0 on Bottom Layer "NONET_L02_P-001" (solid, pour order 9): 63.386,110.452 62.715,110.452 60.987,108.724 58.045,108.724 57.887,108.598 57.787,107.124 51.117,103.904 51.117,99.67 54.25,99.67 55.707,103.925 57.277,103.955 59.679,105.016 60.787,107.124 61.787,107.124 63.387,108.724
1P3V_A on Bottom Layer "NONET_L02_P-001" (solid, pour order 7): 79.553,105.575 79.527,105.588 78.181,105.588 78.181,105.423 77.635,104.877 76.657,104.877 76.657,104.318 76.707,104.268 79.272,104.268 79.272,104.304 79.578,104.61
GND on GND2 "NONET_L02_P-001" (solid, pour order 11): 46.622,126.289 46.584,126.251 46.584,98.908 85.852,98.908 86.03,99.085 86.03,126.289
GND on GND1 "NONET_L02_P-001" (solid, pour order 0): 46.469,126.628 86.335,126.628 86.335,98.628 46.445,98.628

## Keep-outs
Keep-Out Layer:
  lines w0.051: 86.41,98.515 86.41,120.28 86.399,120.292 82.894,120.292 82.828,120.358 82.828,123.718 82.891,123.781 86.41,123.781 86.411,123.782 86.411,126.695 46.203,126.695 46.203,98.514 86.411,98.514 ; 86.41,98.515 86.411,98.514

## Other copper
Top Layer:
  rectangle net GND: 74.308,120.371 75.846,121.026
  rectangle net GND: 53.886,121.945 54.61,123.838
  rectangle net VIN: 70.155,124.181 71.361,125.044
  rectangle net GND: 73.66,117.056 74.443,119.101
  rectangle net NetC117_1: 74.743,117.996 75.755,120.006
  rectangle net GND: 48.743,99.212 50.927,100.635
  rectangle net GND: 50,99.212 50.927,101.663
  rectangle net GND: 47.104,103.607 50.889,104.94
  rectangle net VIN: 47.155,100.901 49.67,102.489
  rectangle net VIN: 48.844,101.867 50.902,103.188
  rectangle net +1.5: 46.647,105.626 47.79,108.966
  rectangle net GND: 57.213,121.564 58.763,122.403
  rectangle net +3.3: 55.232,121.983 56.439,123.33
  rectangle net GND: 71.92,99.911 73.127,101.663
  rectangle net GND: 55.118,99.797 55.842,101.46
  rectangle net +1.0: 51.206,99.797 53.81,101.321
  rectangle net GND: 83.642,103.048 86.004,110.223
  rectangle net GND: 79.604,102.157 80.964,104.775
  rectangle net 1P3V_A: 76.496,113.289 77.644,114.497
  pour cut-out: 79.764,122.784 79.764,121.284 82.764,121.284 82.764,120.282 86.055,120.282 86.03,123.787 82.764,123.787 82.764,122.784
  region net GND: 75.895,106.096 74.993,106.998 74.993,105.195
  text "+" at 47.434,99.109 h1.52
GND1:
  pour cut-out: 86.296,123.782 82.625,123.782 82.625,120.282 86.296,120.282
  pour cut-out: 69.937,108.18 69.531,107.774 70.437,106.868 70.843,107.274
  pour cut-out: 64.987,107.623 64.987,108.226 65.787,108.226 65.787,107.623
  pour cut-out: 71.387,105.219 71.387,105.826 72.187,105.826 72.187,105.223
  pour cut-out: 71.387,106.83 71.387,107.417 72.187,107.417 72.187,106.834
  pour cut-out: 66.29,107.864 66.888,107.864 66.888,107.064 66.293,107.064
SIGNAL:
  pour cut-out: 86.296,123.782 82.625,123.782 82.625,120.282 86.296,120.282
POWER:
  pour cut-out: 62.67,104.33 63.365,104.33 63.37,104.325 63.37,103.672 62.674,103.672 62.67,103.677
  pour cut-out: 64.955,102.436 64.013,102.436 64.013,101.832 64.955,101.832
  pour cut-out: 72.127,105.826 71.327,105.826 71.327,105.223 72.127,105.223
  pour cut-out: 71.447,107.426 72.247,107.426 72.247,106.823 71.447,106.823
  pour cut-out: 69.958,108.18 70.843,107.295 70.416,106.869 69.531,107.753
  pour cut-out: 66.281,107.926 66.281,107.003 67.387,107.003 67.387,107.921
  pour cut-out: 65.847,108.226 64.927,108.226 64.927,107.623 65.847,107.623
  pour cut-out: 86.296,123.782 82.625,123.782 82.625,120.282 86.296,120.282
GND2:
  pour cut-out: 71.447,105.826 72.127,105.826 72.127,105.223 71.447,105.223
  pour cut-out: 71.447,107.426 72.127,107.426 72.127,106.823 71.447,106.823
  pour cut-out: 70.043,108.095 70.843,107.295 70.416,106.869 69.616,107.669
  pour cut-out: 64.987,108.226 65.727,108.226 65.727,107.623 64.987,107.623
  pour cut-out: 66.285,107.804 66.285,107.124 66.888,107.124 66.888,107.804
  pour cut-out: 86.296,123.782 82.625,123.782 82.625,120.282 86.296,120.282
  pour cut-out: 61.722,115.989 57.264,120.447 48.226,120.447 48.226,107.945 49,107.172 59.094,107.172 61.722,109.8
Bottom Layer:
  rectangle net GND: 82.194,123.854 86.092,124.511
  rectangle net GND: 79.718,118.847 82.601,124.485
  rectangle net +3.3: 66.637,99.733 69.545,101.956
  rectangle net VIN: 46.774,99.301 49.708,101.892
  rectangle net GND: 73.609,101.943 75.336,105.004
  rectangle net GND: 74.028,101.93 76.01,102.73
  rectangle net GND: 69.532,114.757 70.574,116.395
  rectangle net GND: 57.582,121.349 59.576,122.771
  rectangle net GND: 62.205,114.008 62.903,114.643
  rectangle net GND: 53.696,123.177 56.446,126.06
  rectangle net GND: 64.706,114.871 65.24,116.98
  rectangle net GND: 82.41,99.251 83.363,102.337
  rectangle net GND: 55.918,99.085 57.01,103.645
  rectangle net VIN: 46.444,124.904 48.578,126.314
  region net GND: 77.554,118.925 77.554,122.244 76.202,122.244 76.202,118.925
  rectangle net GND: 76.035,117.145 85.954,120.218
  rectangle net GND: 69.837,99.276 72.466,104.75
  rectangle net +1.0: 51.105,99.263 54.534,100.588
  rectangle net GND: 69.571,121.399 72.326,122.695
  rectangle net +3.3: 53.886,121.272 55.677,122.961
  region net GND: 53.492,121.234 53.492,123.812 51.968,123.812 51.968,121.234
  rectangle net GND: 77.51,99.314 78.702,101.627
  rectangle net NetC15_2: 83.587,101.689 84.823,102.78
  rectangle net GND: 46.774,122.898 49.606,124.346
  rectangle net +1.5: 49.797,121.082 50.825,123.165
  rectangle net +1.3: 81.102,102.959 84.62,103.822
  rectangle net +3.3: 60.617,119.093 61.862,119.939

## Silkscreen, mask and mechanical layers (free items; w line width, h text height)
Bottom Overlay:
  text "JLCJLCJLCJLC" at 68.582,123.696 h0.8
  text "DEBUG" at 70.18,120.369 h1.52
  text "GND" at 49.548,105.162 h1.52
  text "MIPI-CSI" at 60.388,104.047 h1.52
Top Solder:
  text "Nano VTX" at 79.946,117.856 h1.78
  text "ES01-2023-09-06" at 85.576,104.762 h1.27 r90
  text "+" at 47.434,99.109 h1.52
Bottom Solder:
  rectangle: 82.753,119.85 85.915,120.231
  rectangle: 82.715,123.8 86.004,124.054
Mechanical 1:
  lines w0.051: 46.203,98.514 86.411,98.514 86.411,120.282 82.74,120.282 82.74,123.787 86.36,123.787 86.36,126.695 46.203,126.695 46.203,98.514